# EAGLE board uAMP_v1.0 (EAGLE 4.16)
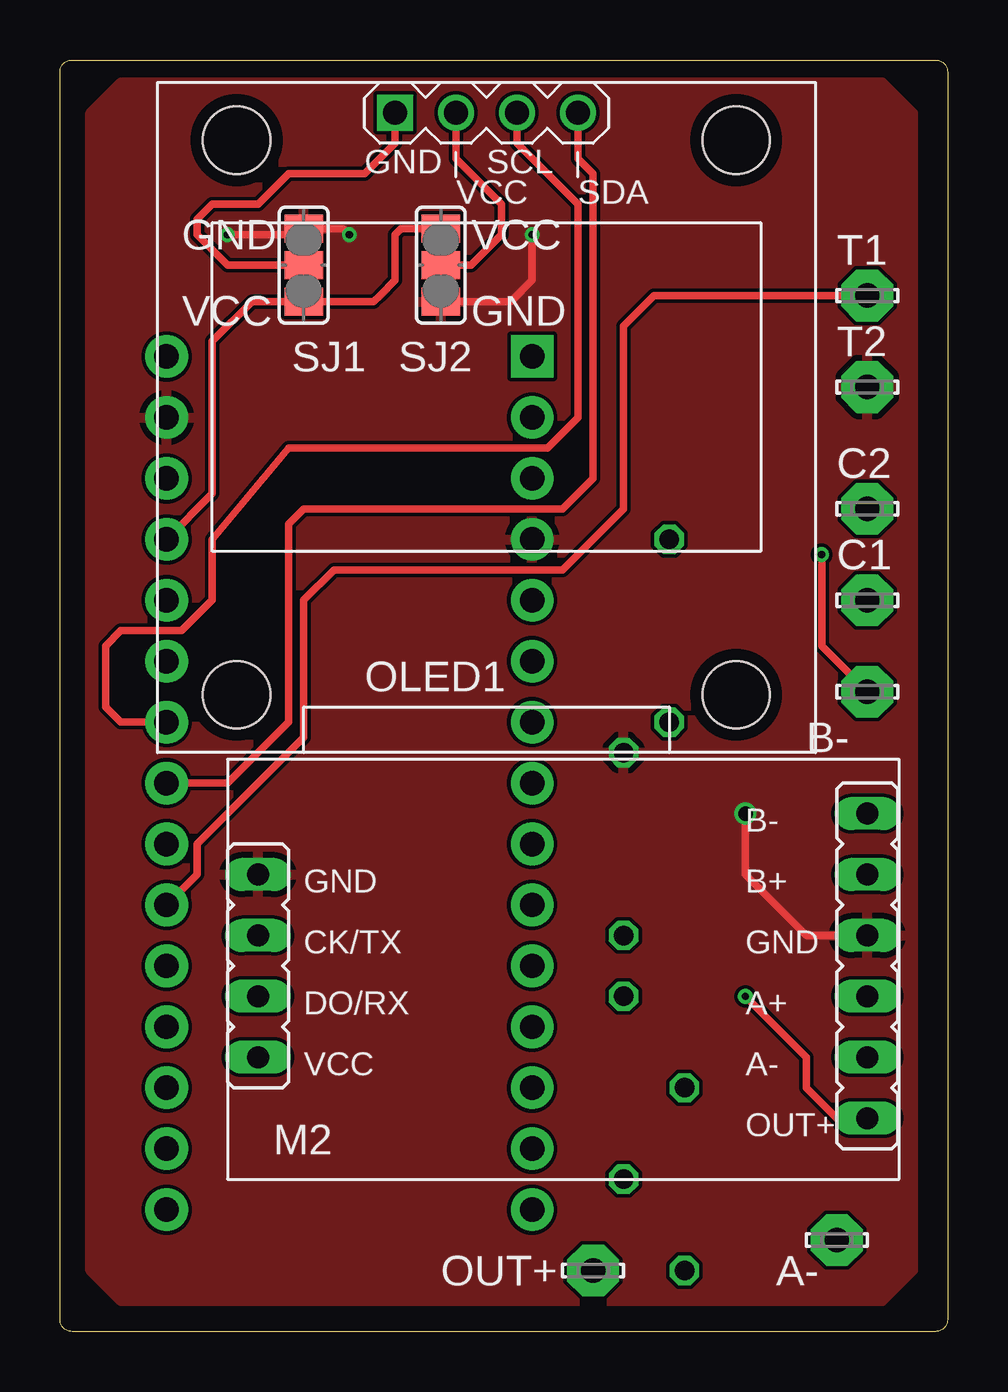
[diagram p0: board, top side]
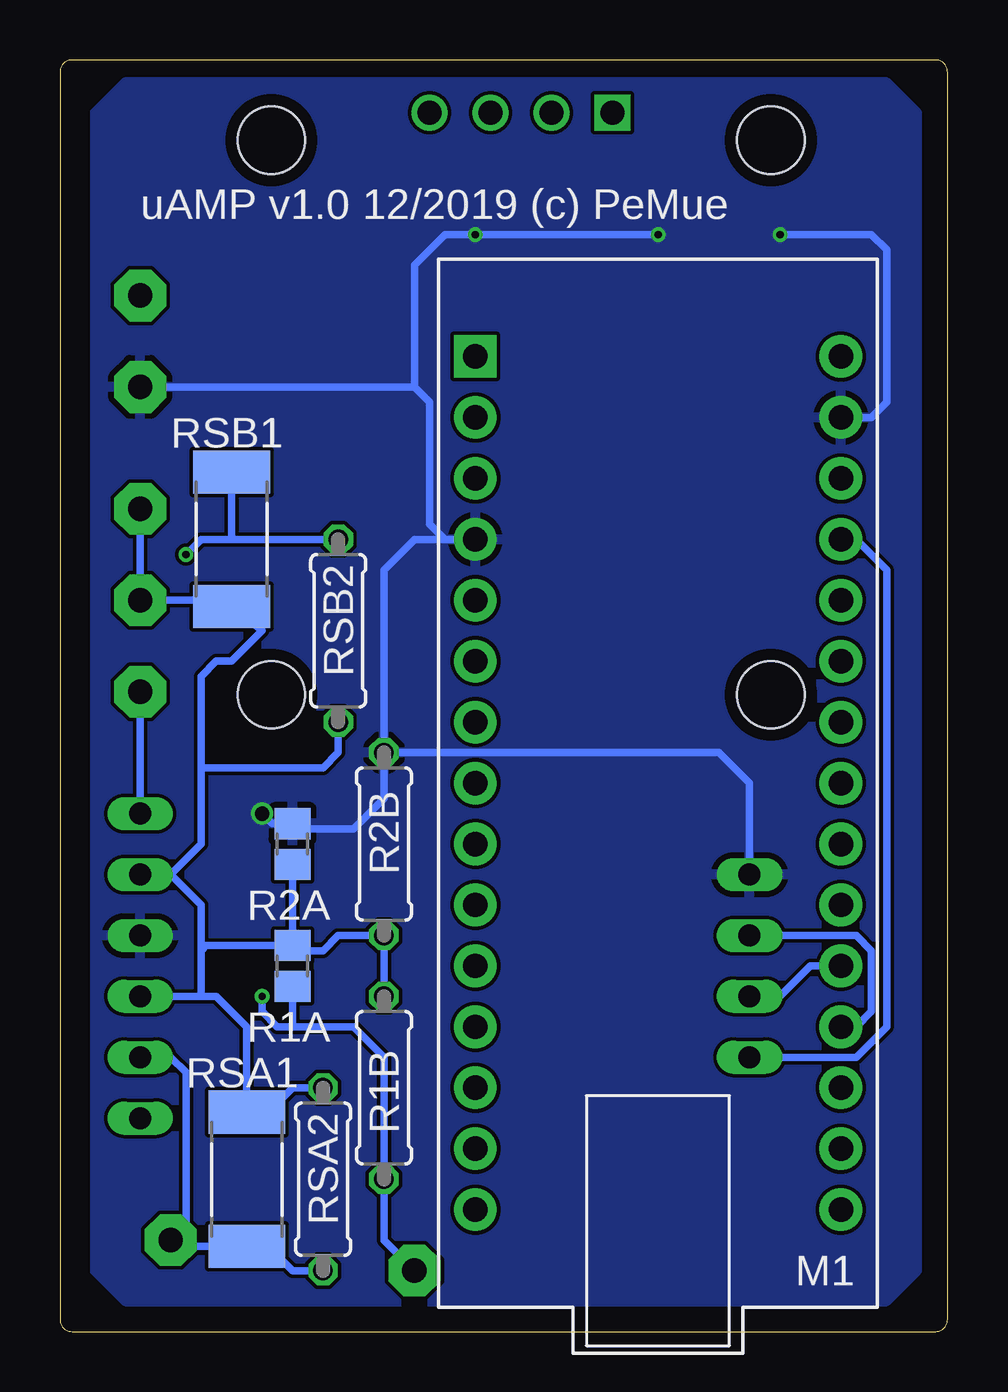
[diagram p1: board, bottom side, seen from below]

Size 37 x 53 mm. Coordinates in mm from the lower left corner, seen from the top.
Outline: 0,52.5 arc-90 0.5,53 36.5,53 arc-90 37,52.5 37,0.5 arc-90 36.5,0 0.5,0 arc-90 0,0.5 0,52.5
Copper layers (1*16): Top 0.035mm / dielectric 1.6mm / Bottom 0.035mm
Design rules "Elecrow_2-layer": minimum track width 6mil, minimum drill 12mil, track to track 6mil, track to pad 6mil, pad to pad 6mil, via to via 8mil, smd to smd 0mil, copper to edge 20mil, drill to drill 10mil, minimum pad ring 6mil, minimum via ring 6mil, stop-mask expansion 0mil, vias tented up to drill 100mil, thermal gap 10mil

## Footprints (pad centres in the part's own frame; a part is rotated, then mirrored left to right if it is on the bottom)
LSP10 = drill 1.016 pad 2.159 octagon: MP 0,0
ARDUINO_NANO1 = drill 1.016 pad 1.778 round: 3V3 15.24,-35.56; +5V 15.24,-10.16; A0 15.24,-30.48; A1 15.24,-27.94; A2 15.24,-25.4; A3 15.24,-22.86; A4 15.24,-20.32; A5 15.24,-17.78; A6 15.24,-15.24; A7 15.24,-12.7; AREF 15.24,-33.02; D0/RX 0,-5.08; D2 0,-12.7; D3 0,-15.24; D4 0,-17.78; D5 0,-20.32; D6 0,-22.86; D7 0,-25.4; D8 0,-27.94; D9 0,-30.48; D10 0,-33.02; D11 0,-35.56; D12 0,-38.1; D13 15.24,-38.1; GND@0 0,-10.16; GND@1 15.24,-5.08; RESET@0 0,-7.62; RESET@1 15.24,-7.62; VIN 15.24,-2.54 | drill 1.016 pad 1.778 square: D1/TX 0,-2.54
HX711 = drill 0.914 long: A+ 26.67,7.62; A- 26.67,5.08; B+ 26.67,12.7; B- 26.67,15.24; CK/TX 1.27,10.16; DO/RX 1.27,7.62; GND@1 1.27,12.7; GND@2 26.67,10.16; OUT+ 26.67,2.54; VCC 1.27,5.08
OLED_128X64_I2C = drill 1 square: 1 -3.81,12.7 | drill 1 round: 2 -1.27,12.7; 3 1.27,12.7; 4 3.81,12.7 | hole 2.8: -10.414,11.557; 10.414,11.557; 10.414,-11.557; -10.414,-11.557
R0805 = smd 1.3 x 1.5: 1 -0.85,0; 2 0.85,0
0207/7 = drill 0.813 octagon: 1 -3.81,0; 2 3.81,0
R2512 = smd 1.8 x 3.2: 1 -2.8,0; 2 2.8,0
SJ_2 = smd 1.168 x 1.6: 1 -1.524,0; 2 0,0; 3 1.524,0

## Placement (x,y rotation side)
A-  LSP10  [LSP10]  32.38,3.81 0 top
B-  LSP10  [LSP10]  33.66,26.67 0 top
C1  LSP10  [LSP10]  33.66,30.48 0 top
C2  LSP10  [LSP10]  33.66,34.29 0 top
M1  ARDUINO_NANO1  [ARDUINO_NANO1]  19.68,43.18 0 bottom
M2  HX711  [HX711]  6.99,6.35 0 top
OLED1  OLED_128X64_I2C  [OLED_128X64_I2C]  17.78,38.1 0 top
OUT+  LSP10  [LSP10]  22.23,2.54 0 top
R1A  1k  [R0805]  27.3,15.24 270 bottom
R1B  1k  [0207/7]  23.5,10.16 270 bottom
R2A  1k  [R0805]  27.3,20.32 270 bottom
R2B  1k  [0207/7]  23.5,20.32 270 bottom
RSA1  1  [R2512]  29.21,6.35 270 bottom
RSA2  1  [0207/7]  26.04,6.35 270 bottom
RSB1  1  [R2512]  29.84,33.02 90 bottom
RSB2  1  [0207/7]  25.4,29.21 90 bottom
SJ1  [SJ_2]  10.16,44.45 90 top
SJ2  [SJ_2]  15.88,44.45 90 top
T1  LSP10  [LSP10]  33.66,43.18 0 top
T2  LSP10  [LSP10]  33.66,39.37 0 top

## Library data of the parts
A- B- C1 C2 OUT+ T1 T2 = solpad
M1 = arduino
M2 = sensor
OLED1 = opto
R1A R1B R2A R2B RSA1 RSA2 RSB1 RSB2 = rcl
SJ1 SJ2 = jumper

## Nets
+5V: M1.+5V M2.VCC SJ1.1 SJ2.3
A-: A-.MP M2.A- RSA1.2 RSA2.2
AB+: C1.MP C2.MP M2.A+ M2.B+ R1A.1 R1B.1 R2A.2 R2B.2 RSA1.1 RSA2.1 RSB1.1 RSB2.1
B-: B-.MP M2.B- RSB1.2 RSB2.2
GND: M1.GND@0 M1.GND@1 M2.GND@1 M2.GND@2 R2A.1 R2B.1 SJ1.3 SJ2.1 T2.MP
N$3: M1.A1 M2.DO/RX
N$4: M1.A0 M2.CK/TX
N$5: M1.A2 T1.MP
OUT+: M2.OUT+ OUT+.MP R1A.2 R1B.2
SCL: M1.A5 OLED1.3
SDA: M1.A4 OLED1.4
SUPPLY1: OLED1.1 SJ1.2
SUPPLY2: OLED1.2 SJ2.2

## Tracks (layer width: path | path; a pad name or v marks a point on that pad's centre or on a via)
+5V
  Top 0.305: M1.+5V 6.35,34.92 6.35,41.27 8,42.93 SJ1.1 13.08,42.93 13.34,43.18 13.97,43.81 13.97,45.72 14.22,45.97 SJ2.3
  Bottom 0.305: M2.VCC 3.81,11.43 2.54,12.7 2.54,31.75 3.81,33.02 M1.+5V
A-
  Bottom 0.305: RSA2.2 27.3,2.54 28.32,3.55 RSA1.2 32.12,3.55 A-.MP 31.75,4.45 31.75,10.79 32.38,11.43 M2.A-
AB+
  Bottom 0.305: RSA2.1 27.3,10.16 28.32,9.15 RSA1.1 29.21,12.7 30.48,13.97 31.11,13.97 | 31.11,13.97 M2.A+ | 31.11,15.88 31.11,13.97 | 31.11,15.88 31.11,17.78 32.38,19.05 | C2.MP C1.MP 30.48,30.48 30.22,30.22 RSB1.1 28.57,29.21 29.84,27.94 30.48,27.94 31.11,27.3 31.11,23.5 | 32.38,19.05 M2.B+ | 32.38,19.05 31.11,20.32 31.11,23.5 | RSB2.1 25.4,24.13 26.04,23.5 31.11,23.5 | R1A.1 R2A.2 | R1B.1 R2B.2 25.4,16.51 26.04,15.88 27.3,15.88 R1A.1 | R1A.1 30.9,16.09 31.11,15.88
B-  (via drill 0.3)
  Top 0.305: v31.75,32.38 31.75,28.57 B-.MP
  Bottom 0.305: M2.B- B-.MP | v31.75,32.38 31.11,33.02 29.84,33.02 | 29.84,33.02 RSB2.2 | 28.57,36.2 RSB1.2 29.84,33.02
GND  (via drill 0.3, 0.6)
  Top 0.305: v28.57,21.59 28.57,19.05 31.11,16.51 M2.GND@2 | v6.99,45.72 9.53,45.72 SJ1.3 11.81,45.97 v12.06,45.72 | SJ2.1 18.8,42.93 19.68,43.81 v19.68,45.72
  Bottom 0.305: R2B.1 23.5,22.23 24.77,20.95 26.67,20.95 27.09,21.17 R2A.1 28.16,21.17 v28.57,21.59 | M2.GND@1 8.26,22.86 9.53,24.13 R2B.1 | 22.23,39.37 T2.MP | 22.23,39.37 21.59,38.73 21.59,34.29 21.59,33.66 20.95,33.02 M1.GND@0 22.23,33.02 23.5,31.75 R2B.1 | M1.GND@1 3.17,38.1 2.54,38.73 2.54,45.09 3.17,45.72 v6.99,45.72 | 22.23,39.37 22.23,44.45 20.95,45.72 | 20.95,45.72 v19.68,45.72 | v19.68,45.72 v12.06,45.72 | 20.95,45.72 v19.68,45.72
  pour Bottom: 2.54,52.07 34.29,52.07 35.56,50.8 35.56,2.54 34.29,1.27 2.54,1.27 1.27,2.54 1.27,50.8
  pour Top: 2.54,52.07 34.29,52.07 35.56,50.8 35.56,2.54 34.29,1.27 2.54,1.27 1.27,2.54 1.27,50.8
N$3
  Bottom 0.305: M2.DO/RX 6.99,13.97 5.71,15.24 M1.A1
N$4
  Bottom 0.305: M2.CK/TX 3.81,16.51 3.17,15.88 3.17,13.34 3.81,12.7 M1.A0
N$5
  Top 0.305: M1.A2 5.71,19.05 5.71,20.32 10.16,24.77 10.16,30.48 11.43,31.75 20.95,31.75 23.5,34.29 23.5,41.91 24.77,43.18 T1.MP
OUT+  (via drill 0.3)
  Top 0.305: M2.OUT+ 32.38,8.89 31.11,10.16 31.11,11.43 v28.57,13.97
  Bottom 0.305: OUT+.MP 23.5,3.81 R1B.2 23.5,10.16 23.5,11.43 24.77,12.7 27.3,12.7 | 27.3,12.7 R1A.2 | 27.3,12.7 27.94,12.7 28.57,13.34 v28.57,13.97
SCL
  Top 0.305: OLED1.3 19.05,49.53 21.59,46.99 21.59,38.1 20.32,36.83 9.53,36.83 6.35,33.02 6.35,30.48 5.08,29.21 2.54,29.21 1.91,28.57 1.91,26.04 2.54,25.4 M1.A5
SDA
  Top 0.305: M1.A4 6.99,22.86 9.53,25.4 9.53,33.66 10.16,34.29 20.95,34.29 22.23,35.56 22.23,48.26 21.59,48.9 OLED1.4
SUPPLY1
  Top 0.305: SJ1.2 6.99,44.45 5.71,45.72 5.71,46.35 6.35,46.99 8.26,46.99 9.53,48.26 12.7,48.26 13.97,49.53 OLED1.1
SUPPLY2
  Top 0.305: OLED1.2 16.51,48.9 18.41,46.99 18.41,45.72 17.14,44.45 SJ2.2

## Text on the board
tPlace: GND | VCC | VCC | GND
bPlace: uAMP v1.0 12/2019 (c) PeMue